# Altium PCB TestPowerMergeBoard.PcbDoc
Units mil, origin at the board's own origin, x right, y up, seen from the top; angles counter-clockwise.
Board outline 5140 x 2420 mil, 2 copper layers (Top Layer, Bottom Layer); 30 components, 14 nets, 78 pads, 27 vias.
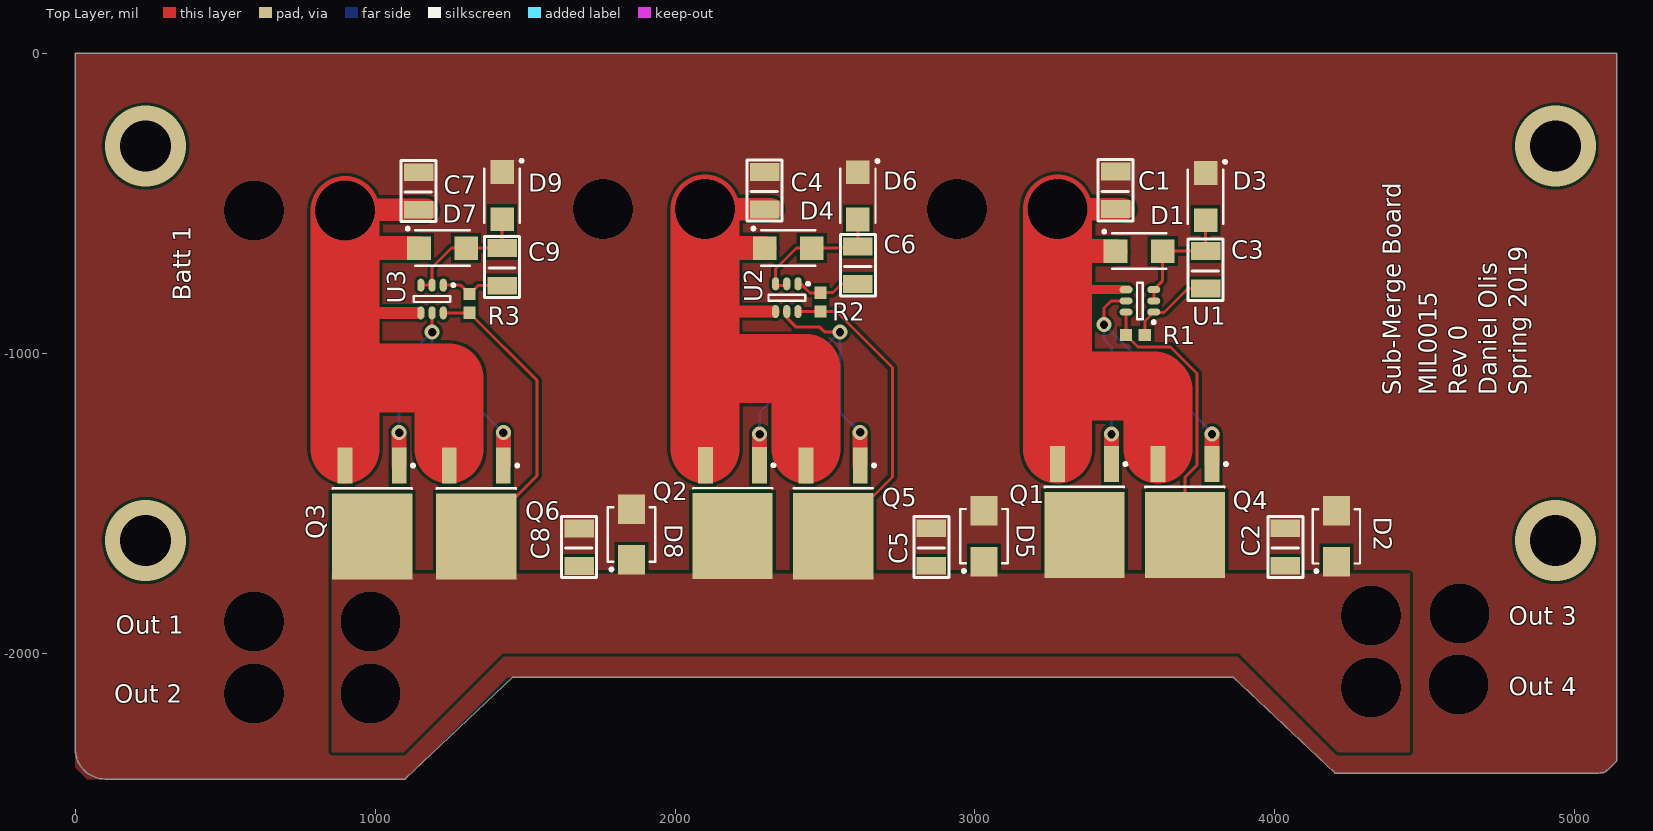
[diagram p0: Top Layer view]
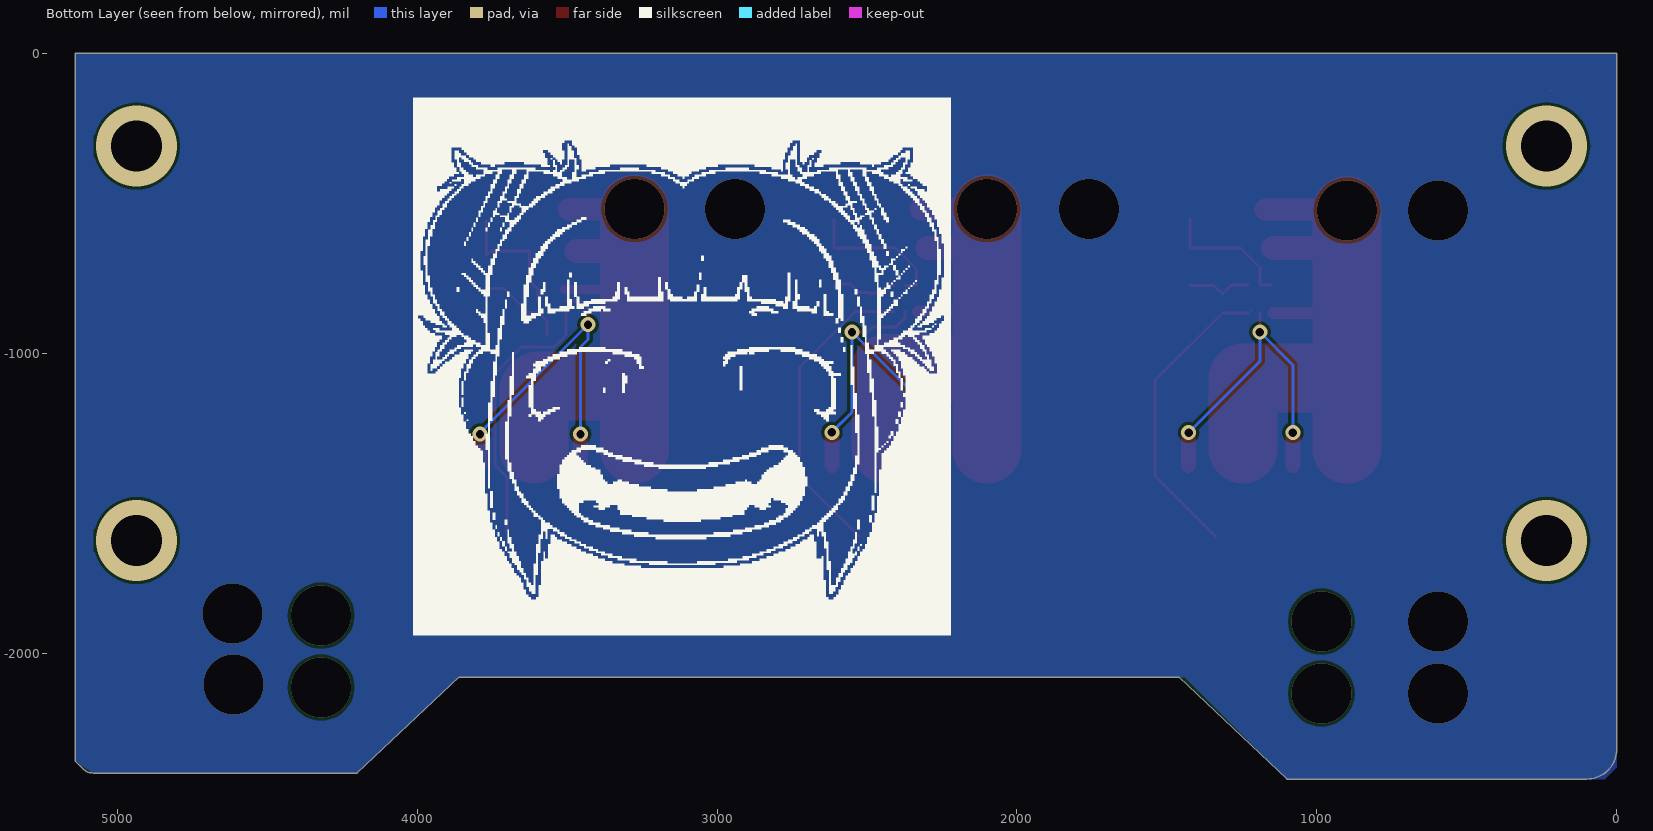
[diagram p1: Bottom Layer view, seen from below]

## Layer stack, top to bottom
Top Solder: solder mask 0.4, Solder Resist, Dk 3.5
Top Layer: signal copper 1.4
Dielectric 1: dielectric 12.6, FR-4, Dk 4.8
Bottom Layer: signal copper 1.4
Bottom Solder: solder mask 0.4, Solder Resist, Dk 3.5

## Board outline
0,0 0,-2320 ccw(c100,-2320) 100,-2420 1100,-2420 1460,-2080 3860,-2080 4200,-2400 5080,-2400 ccw(c5080,-2351.72) 5114.14,-2385.86 5140,-2360 5140,0
cut-out: 220,-125

## Design rules (kind name [scope] priority, off if disabled: settings)
Clearance [All] p1: gap=10 ignorepadtopadclearanceinfootprint=FALSE except(0: Arc-Hole Track-Hole SMDPad-Hole THPad-Hole Via-Hole Fill-Hole Poly-Hole Region-Hole Text-Hole)
PolygonConnect [All] p1: connectstyle=Direct reliefconductorwidth=10 reliefentries=4 polygonreliefangle="90 Angle" airgapwidth=10
RoutingVias [All] p1: holewidth=28 width=50 viastyle="Through Hole" minholewidth=28 minwidth=50 maxholewidth=28 maxwidth=50
SolderMaskExpansion [All] p1: expansion=4
Width [All] p1: maxlimit=1000 minlimit=10 preferedwidth=10 bottomlayer_maxwidth=10 minimp=50.000000 maximp=50.000000 favimp=50.000000
30 further rules are at their usual default settings.

## Components (designator, comment, footprint, x,y, rotation, side; value= is the part's Value field where it differs from the comment)
C1 "CAP1210" CAP1210 3468.52,-520.79 r270 top value=1uF
C2 "CAP1210" CAP1210 4035,-1710.2 r270 top value=22uF
C3 "CAP1210" CAP1210 3768.78,-785.79 r270 top value=100nF
C4 "CAP1210" CAP1210 2298.52,-521.98 r270 top value=1uF
C5 "CAP1210" CAP1210 2855,-1710.2 r270 top value=22uF
C6 "CAP1210" CAP1210 2609.52,-770.79 r270 top value=100nF
C7 "CAP1210" CAP1210 1145,-523.18 r270 top value=1uF
C8 "CAP1210" CAP1210 1680,-1710.79 r270 top value=22uF
C9 "CAP1210" CAP1210 1423.52,-775.98 r270 top value=100nF
D1 "SS16T3G" SS16T3G 3547.26,-660 r0 top
D2 "SMBJ60A-13-F" SMBJ60A-13-F 4205,-1610.77 r90 top
D3 "SS16T3G" SS16T3G 3768.78,-478.54 r270 top
D4 "SS16T3G" SS16T3G 2377.26,-650 r0 top
D5 "SMBJ60A-13-F" SMBJ60A-13-F 3030,-1610.44 r90 top
D6 "SS16T3G" SS16T3G 2609.52,-475.94 r270 top
D7 "SS16T3G" SS16T3G 1225,-650 r0 top
D8 "SMBJ60A-13-F" SMBJ60A-13-F 1855,-1605 r90 top
D9 "SS16T3G" SS16T3G 1423.52,-475 r270 top
Q1 "IRFB3306PbF" IRLR3636PbF 3364.98,-1529.45 r270 top
Q2 "IRFB3306PbF" IRLR3636PbF 2191.84,-1533.45 r270 top
Q3 "IRFB3306PbF" IRLR3636PbF 990.16,-1534.45 r270 top
Q4 "IRFB3306PbF" IRLR3636PbF 3700.14,-1529.45 r270 top
Q5 "IRFB3306PbF" IRLR3636PbF 2527,-1534 r270 top
Q6 "IRFB3306PbF" IRLR3636PbF 1337.4,-1534.45 r270 top
R1 "Res" RES0603 3535,-940 r0 top value=100
R2 "Res" RES0603 2485,-830 r90 top value=100
R3 "Res" RES0603 1315,-834.53 r90 top value=100
U1 "LM5050-1" LM5050 3549.78,-826 r180 top
U2 "LM5050-1" LM5050 2372.6,-815.26 r270 top
U3 "LM5050-1" LM5050 1190,-819.76 r270 top

## Footprints (in the part's own frame and the unit in brackets; to place one, negate y for a bottom-side part, rotate by r counter-clockwise, add the part's x,y. Pads: shape width x height; smd on the part's side, far side on the other; paste and mask are expansions set on the pad)
CAP1210 [mm]
  rect 1.5x2.5 smd: 1(-0.02,0) 2(-3.2,0)
  silkscreen extent -4.2,-1.48 0.97,1.48, body extent -3.22,-1.25 0,1.26, height 2.5
IRLR3636PbF [mm] "D-PAK, 3-Pads, Body 6.2x6.7mm (max), IPC Medium Density"
  rect 7.3x6.8 smd: D(1.95,0)
  rect 3.05x1.25 smd: G(-4.05,2.29) S(-4.05,-2.29)
  silkscreen extent -4.17,-3.35 -2.1,3.59, body extent -2.55,-3.37 3.67,3.37, height 2.39
LM5050 [mm] "SOT23, 6-Leads, Body 2.90x2.80mm, Pitch 0.95mm, IPC Medium Density"
  oval 1.1x0.6 smd: 1(-1.175,0.95) 2(-1.175,0) 3(-1.175,-0.95) 4(1.175,-0.95) 5(1.175,0) 6(1.175,0.95)
  silkscreen extent -1.3,-1.55 0.25,1.92, body extent -0.87,-1.52 0.88,1.53, height 1.1
RES0603 [mm] "Chip Resistor, 2-Leads, Body 1.60x0.80mm, IPC Medium Density"
  rect 1.05x1 smd: 1(-0.8,0) 2(0.8,0)
  body extent -0.88,-0.48 0.87,0.47, height 0.8
SMBJ60A-13-F [mm] "TVS UNIDIRECT 600W 60V SMB"
  rect 2.5x2.3 smd: A(2.15,0) C(-2.15,0)
  silkscreen extent -3.07,-2 2.3,2, body extent -2.29,-1.97 2.28,1.97, height 2.62
SS16T3G [mm] "DIODE SCHOTTKY 60V 1A SMA"
  rect 2x2 smd: A(2,0) C(-2,0)
  silkscreen extent -3.07,-1.5 2.3,1.77, body extent -2.29,-1.46 2.28,1.46, height 2.2

## Part data
C1 C2 C3 C4 C5 C6 C7 C8 C9: "CAP CER 10UF 50V 20% X5R 1210", Supplier Part Number 1=587-2225-1-ND, Supplier 1=Digi-Key
D1 D3 D4 D6 D7 D9: "DIODE SCHOTTKY 60V 1A SMA", Supplier Part Number 1=SS16T3GOSDKR-ND, Supplier 1=Digi-Key
D2 D5 D8: "TVS UNIDIRECT 600W 60V SMB", Supplier Part Number 1=SMBJ60A-FDIDKR-ND, Supplier 1=Digi-Key
Q1 Q2 Q3 Q4 Q5 Q6: library part IRFx3306PbF, "HEXFET Power MOSFET", Supplier Part Number 1=IRFB3306PBF-ND, Heatsink=A10755-ND, Supplier 1=Digi-Key
R1 R2 R3: Supplier Part Number 1=RMCF0603JT10K0CT-ND, Supplier 1=Digi-Key
U1 U2 U3: library part LM5050, "High-Side OR-ing FET Controller", Supplier Part Number 1=LM5050MK-1/NOPBCT-ND, Supplier 1=Digi-Key

## Via types
v1: diameter 200, hole 200, Top Layer to Bottom Layer, 14 vias
v2: diameter 50, hole 28, Top Layer to Bottom Layer, 9 vias
v3: diameter 270, hole 170, Top Layer to Bottom Layer, 4 vias

## Nets (pads, with @x,y where several pads share a name; then routed paths per layer and width w, separated by ;. In a path a pad name is that pad's centre, name@x,y a point inside that pad or via, vN(x,y) a via of type N, cw(c..) or ccw(c..) an arc to the next point about the centre after c; other vN are vias at no path point)
Batt1: C1.1 D1.C Q1.S Q4.S U1.4 | length 1985.1
  Top Layer w30: 3274.83,-788.6 U1.4 U1.4@3510,-788.6
  Top Layer w75: v1(3274.83,-520) C1.1 C1.1@3495,-520
  Top Layer w80: 3274.83,-660 D1.C
  Top Layer w230: Q1.S@3274.83,-1320 3274.83,-1122 3286.83,-1110 3597.98,-1110 3609.98,-1122 Q4.S@3609.98,-1320 ; 3274.83,-1115 3274.83,-788.6 3274.83,-660 v1(3274.83,-520)
Batt2: C4.1 D4.C Q2.S Q5.S U2.4 | length 2062.3
  Top Layer w10: 2100,-1055 2103.16,-1051.84 ; 2100,-865 2103.48,-861.52 ; 2100,-660 cw(c2124.14,-684.14) 2124.14,-650 ; C4.1@2295.63,-520 cw(c2295.63,-524.09) C4.1
  Top Layer w40: 2103.48,-861.52 U2.4@2330.1,-861.52
  Top Layer w75: v1(2100,-520) 2295.63,-520 C4.1@2320,-520
  Top Layer w80: 2124.14,-650 D4.C
  Top Layer w230: Q2.S@2100,-1320 2100,-1055 2100,-865 2100,-660 v1(2100,-520) ; 2103.16,-1051.84 2436.84,-1051.84 Q5.S@2436.84,-1320
Batt3: C7.1 D7.C Q3.S Q6.S U3.4 | length 2195.5
  Top Layer w10: Q3.S@895,-1370 Q3.S@900,-1319 ; 900,-1085 902.24,-1082.76 ; 900,-865 901.02,-866.02 ; 900,-655 905,-650 ; v1(900,-525) v1@902.61,-522.39
  Top Layer w40: 901.02,-866.02 U3.4@1145,-866.02
  Top Layer w75: v1@902.61,-522.39 C7.1 C7.1@1170,-522.39
  Top Layer w80: 905,-650 D7.C
  Top Layer w230: Q3.S@900,-1319 900,-1085 900,-865 900,-655 v1(900,-525) ; 902.24,-1082.76 1247.24,-1082.76 Q6.S@1247.24,-1320
GND: C1.2 C2.2 C4.2 C5.2 C7.2 C8.2 D2.A D3.C D5.A D6.C D8.A D9.C
  other v1: 597,-2135 4612,-2105 597,-1895 4615,-1867.5 596.25,-525 1760,-520 2940,-520
NetC3_1: C3.1 R1.2 U1.1 | length 294.7
  Top Layer w10: R1.2 3566.5,-892.95 U1.1 ; U1.1@3596.04,-864.88 3630.12,-864.88 3710,-785 C3.1
NetC3_2: C3.2 D1.A D3.A U1.2 U1.3 | length 445.1
  Top Layer w10: U1.2 U1.3 3626,-758.64 D1.A 3753.78,-660 3768.78,-675 D3.A
NetC6_1: C6.1 R2.2 U2.1 | length 231.1
  Top Layer w10: U2.1@2410,-774 U2.1@2419,-774 ; U2.1@2419,-769 2450,-800 R2.2@2483.5,-800 ; R2.2@2483.5,-805 2490.09,-798.42 2526.78,-798.42 2555.2,-770 2599.32,-770 C6.1@2609.52,-780.2
NetC6_2: C6.2 D4.A D6.A U2.2 U2.3 | length 483.4
  Top Layer w10: U2.3 2335.2,-719.8 2405,-650 D4.A 2609.52,-650 C6.2 D6.A ; U2.3@2337,-774 U2.2@2372.6,-774
NetC9_1: C9.1 R3.2 U3.1 | length 219.9
  Top Layer w10: U3.1 1285.47,-773.5 R3.2 1342.83,-775.2 C9.1
NetC9_2: C9.2 D7.A D9.A U3.2 U3.3 | length 452.6
  Top Layer w10: U3.3 U3.2 1190,-715 1255,-650 D7.A C9.2 D9.A
NetQ1_G: Q1.G Q4.G U1.5 | length 1228.1
  Top Layer w10: v2(3430,-905) 3430,-850 3454,-826 U1.5 ; Q1.G@3455,-1369.86 Q1.G
  Top Layer w50: Q1.G@3455,-1369.86 v2(3455,-1270) ; Q4.G v2(3790.3,-1270)
  Bottom Layer w10: v2(3455,-1270) 3455,-980 3430,-955 v2(3430,-905) 3790.3,-1265.3 v2(3790.3,-1270)
NetQ2_G: Q2.G Q5.G U2.5 | length 1245.5
  Top Layer w10: U2.5 2372.6,-882.6 2402.33,-912.33 2481.18,-912.33 2490.69,-921.84 2498.85,-930 v2(2550,-930)
  Top Layer w50: Q2.G v2(2282,-1270) ; Q5.G v2(2617.16,-1264)
  Bottom Layer w10: v2(2282,-1270) 2282,-1198 v2(2550,-930) 2550,-1196.84 v2(2617.16,-1264)
NetQ3_G: Q3.G Q6.G U3.5 | length 1109.9
  Top Layer w10: v2(1190,-930) U3.5
  Top Layer w50: Q3.G v2(1080.32,-1265) ; Q6.G v2(1427.56,-1265)
  Bottom Layer w10: v2(1080.32,-1265) 1080.32,-1039.68 v2(1190,-930) 1190,-1027.44 v2(1427.56,-1265) v2@1427.56,-1252.87
PWR_MERGE: C2.1 C5.1 C8.1 D2.C D5.C D8.C Q1.D Q2.D Q3.D Q4.D Q5.D Q6.D R1.1 R2.1 R3.1 U1.6 U2.6 U3.6 | length 2984.8
  Top Layer w10: U3.6 R3.1 1540,-1091.02 1540,-1408.62 Q6.D ; Q2.D@2219.84,-1601.22 Q2.D@2240,-1621.38 ; U2.6 R2.1 2538.09,-861.52 2725,-1048.43 2725,-1412.77 Q5.D ; U1.6 R1.1 3543.5,-980 3651.83,-980 3739.98,-1068.15 3739.98,-1373.85 3700.14,-1413.69 Q4.D@3700.14,-1595
  other v1: 985,-2135 4320,-2115 985,-1895 4320,-1875
copper on no net:
  other v3: 235,-1625 4935,-1625 235,-310 4935,-310

## Polygon pours and split planes (outlines as drawn)
GND on Bottom Layer (solid, pour order 136): 5080,-2400 5140,-2360 5140,0 5080.17,0
GND on Bottom Layer (solid, pour order 132): 0,0 5080,0 5080,-2400 4200,-2400 3860,-2080 1440,-2080 1100,-2420 40,-2420 0,-2380
no net on Bottom Layer "Bottom Layer-No Net" (solid, pour order 108): 1685,-1555
GND on Top Layer (solid, pour order 134): 5080,-2400 5100,-2400 5140,-2360 5140,0 5080,0
GND on Top Layer (solid, pour order 130): 0,0 5080,0 5080,-2400 4200,-2400 3860,-2080 1440,-2080 1100,-2420 40,-2420 0,-2380
GND on Top Layer "Top Layer-GND 3" (solid, pour order 110): 2805,-1560 2900,-1560 2980,-1480 3075,-1480 3075,-157 2805,-157
GND on Top Layer "Top Layer-GND 5" (solid, pour order 100): 455,-2330 737.5,-2330 737.5,-157 455,-157
GND on Top Layer "Top Layer-GND 4" (solid, pour order 106): 1725,-1560 1805,-1480 1900,-1480 1900,-157 735,-157 735,-370 1630,-370 1630,-1560
GND on Top Layer "Top Layer-GND 6" (solid, pour order 126): 4250,-1480 4490,-1480 4490,-2330 4740,-2330 4740,-1235 4250,-1235
PWR_MERGE on Top Layer "Bottom Layer-PWR_MERGE" (solid, pour order 116): 3880,-2000 4210,-2330 4449,-2330 4449,-1735.02 4448.98,-1735 3880,-1735
PWR_MERGE on Top Layer "Top Layer-PWR_MERGE" (solid, pour order 104): 1425,-2000 4450,-2000 4450,-1734.97 856,-1735.02 856,-2330 1095,-2330
GND on Top Layer "Top Layer-GND" (solid, pour order 124): 3985,-157 3075,-157 3075,-370 3985,-370
GND on Top Layer "Top Layer-GND 1" (solid, pour order 122): 4160,-1480 4085,-1555 3985,-1555 3985,-157 4250,-157 4250,-200 4250,-1480
no net on Top Layer "Top Layer-No Net 3" (solid, pour order 120): 3985,-1555
GND on Top Layer "Top Layer-GND 2" (solid, pour order 114): 1900,-157 2805,-157 2805,-370 1900,-370
no net on Top Layer "Top Layer-No Net 4" (solid, pour order 112): 2785,-855
no net on Top Layer "Top Layer-No Net 1" (solid, pour order 26): 1268.52,-718
no net on Top Layer "Top Layer-No Net 2" (solid, pour order 22): 1226.4,-911
no net on Top Layer "Top Layer-No Net" (solid, pour order 16): 1257.4,-811.48
no net on Top Solder (solid): 2805,-372.5 2807.5,-370 3075,-370 3075,-1475 3070,-1480 2980,-1480 2905,-1555 2805,-1555
no net on Top Solder (solid): 855,-2330 1095,-2330 1425,-2000 3880,-2000 4210,-2330 4450,-2330 4450,-1735 860,-1735 855,-1730
no net on Top Solder (solid): 1630,-370 1895,-370 1900,-375 1900,-1470 1815,-1470 1730,-1555 1630,-1555
no net on Top Solder (solid): 4250,-370 3985,-370 3985,-1235 4250,-1235
no net on Top Solder (solid): 4490,-1235 3985,-1235 3985,-1550 4090,-1550 4160,-1480 4490,-1480
no net on Top Solder (solid): 4490,-2330 4740,-2330 4740,-1235 4490,-1235
no net on Top Solder (solid): 740,-155 740,-370 4250,-370 4250,-155
no net on Top Solder (solid): 450,-2330 740,-2330 740,-160 450,-160

## Silkscreen, mask and mechanical layers (free items; w line width, h text height)
Top Overlay:
  text "Batt 1" at 385,-826 h60 r90
  text "Sub-Merge Board" at 4420,-1140 h60 r90
  text "MIL0015" at 4540,-1140 h60 r90
  text "Rev 0" at 4640,-1140 h60 r90
  text "Daniel Olis" at 4740,-1140 h60 r90
  text "Spring 2019" at 4840,-1140 h60 r90
  text "Out 3" at 4780,-1905 h60
  text "Out 1" at 135,-1935 h60
  text "Out 4" at 4780,-2140 h60
  text "Out 2" at 130,-2165 h60
Bottom Overlay:
  drawing of 55 lines, arcs and shapes, not listed
BO:
  lines w10: 0,-2340 ccw(c110,-2310) 80,-2420 90,-2420 1095,-2420 1445,-2070 3870,-2070 4200,-2400 5100,-2400 5140,-2360 5140,-2350 5140,0 0,0 0,-2340